# Altium PCB ESP32-Pico-Pill.PcbDoc
Units mil, origin at the board's own origin, x right, y up, seen from the top; angles counter-clockwise.
Board outline 1496.06 x 787.4 mil, 2 copper layers (Top Layer, Bottom Layer); 33 components, 54 nets, 231 pads, 65 vias.
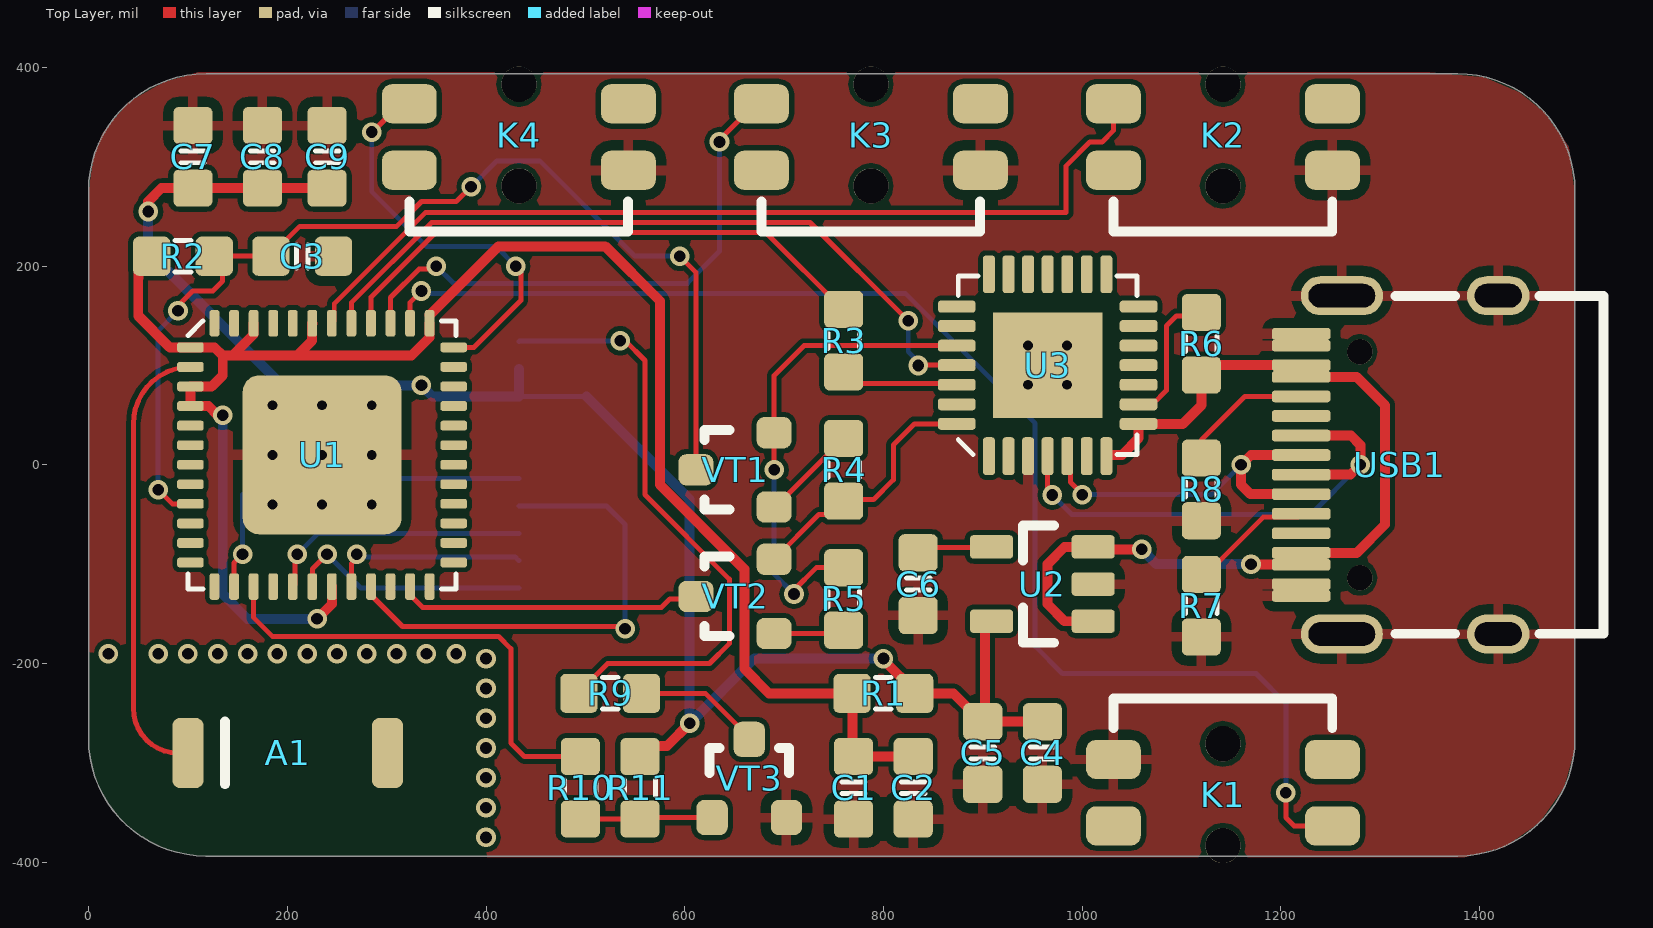
[diagram p0: Top Layer view]
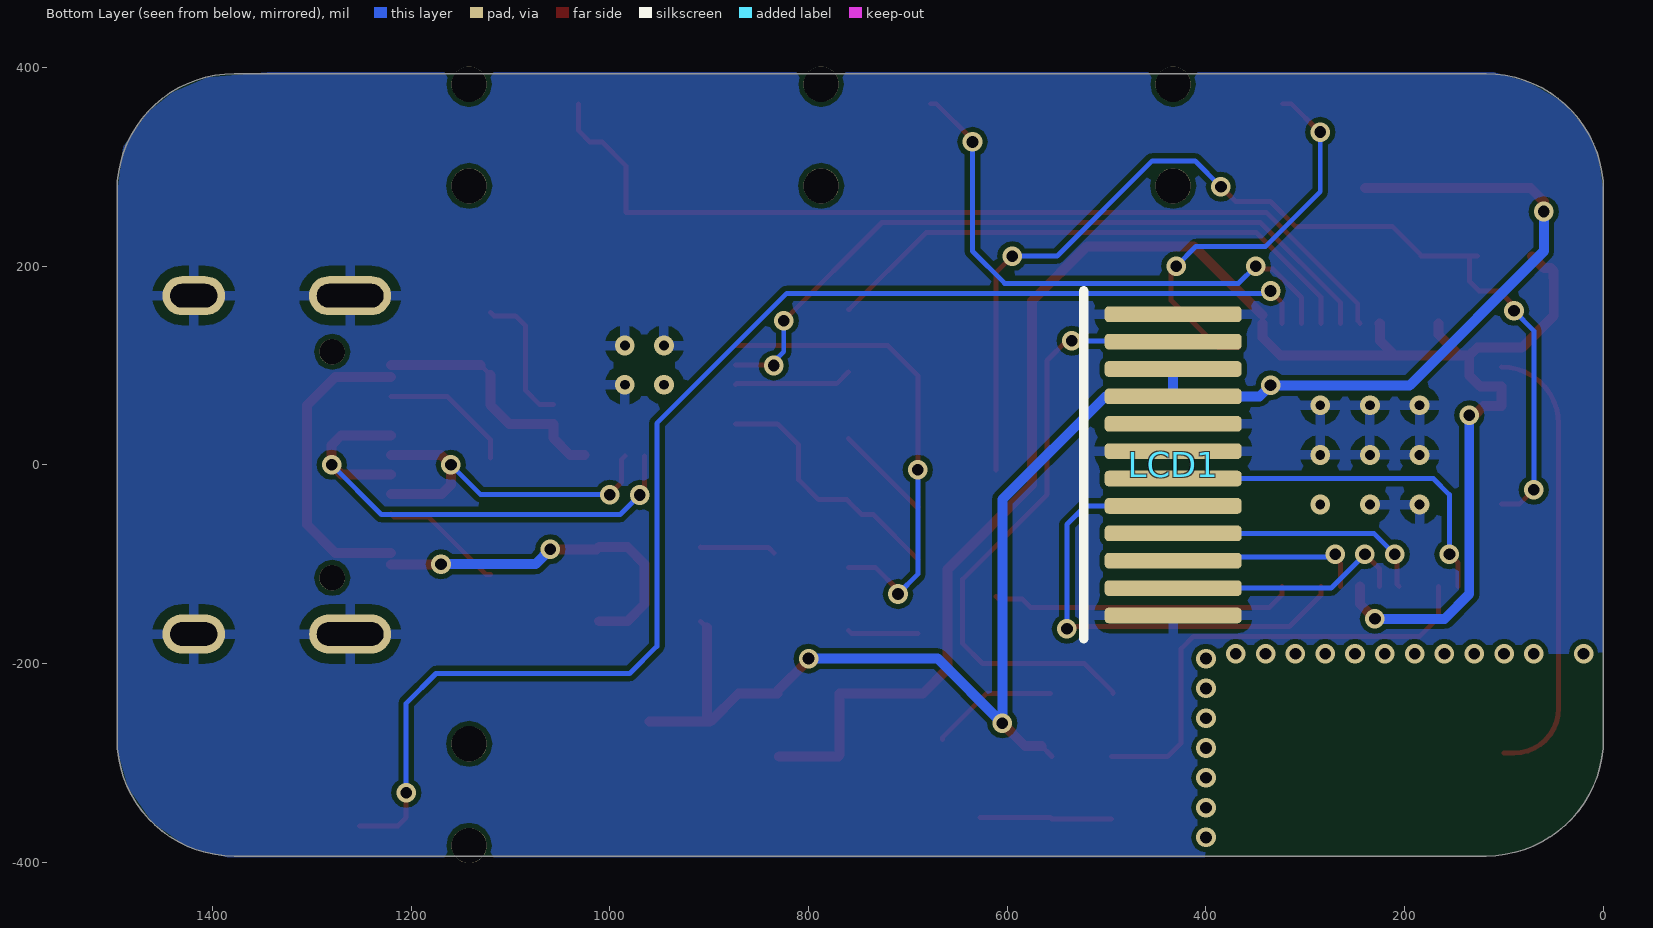
[diagram p1: Bottom Layer view, seen from below]

## Layer stack, top to bottom
Top Solder: solder mask 0.4, Solder Resist, Dk 3.5
Top Layer: signal copper 1.4
Dielectric 1: dielectric 12.6, FR-4, Dk 4.8
Bottom Layer: signal copper 1.4
Bottom Solder: solder mask 0.4, Solder Resist, Dk 3.5

## Board outline
118.11,-393.7 cw(c118.11,-275.59) 0,-275.59 0,275.59 cw(c118.11,275.59) 118.11,393.7 1377.95,393.7 cw(c1377.95,275.59) 1496.06,275.59 1496.06,-275.59 cw(c1377.95,-275.59) 1377.95,-393.7

## Design rules (kind name [scope] priority, off if disabled: settings)
Clearance [All] p1: gap=5 ignorepadtopadclearanceinfootprint=FALSE
DiffPairsRouting [All] p1: maxlimit=10 minlimit=3.5 mostfreqgap=3.5 toplayer_minwidth=15 toplayer_maxwidth=15 toplayer_prefwidth=15 bottomlayer_minwidth=15 bottomlayer_maxwidth=15 bottomlayer_prefwidth=15 maxuncoupledlength=500
HoleSize [All] p1: absolutevalues=TRUE maxlimit=248.03 minlimit=7.87 maxpercent=80.000 minpercent=20.000
PolygonConnect [All] p1: connectstyle=Relief reliefconductorwidth=10 reliefentries=4 polygonreliefangle="90 Angle" airgapwidth=10
RoutingTopology [All] p1: topology=Daisy_Simple
RoutingVias [All] p1: holewidth=11.81 width=19.68 viastyle="Through Hole" minholewidth=11.81 minwidth=19.68 maxholewidth=28 maxwidth=50
SolderMaskExpansion [All] p1: expansion=3
Width [All] p1: maxlimit=10 minlimit=5 preferedwidth=5
27 further rules are at their usual default settings.

## Components (designator, comment, footprint, x,y, rotation, side; value= is the part's Value field where it differs from the comment)
A1 "RAINSUN" ANT-Rainsun-AN5120 200.47,-290 r0 top
C1 "10uF" CAP_0603 770,-325 r90 top
C2 "0.1uF" CAP_0603 830,-325 r90 top
C3 "0.1uF" CAP_0603 215,210 r180 top
C4 "0.1uF" CAP_0603 960,-290 r270 top
C5 "10uF" CAP_0603 900,-290 r270 top
C6 "10nF" CAP_0603 835,-120 r270 top
C7 "0.1uF" CAP_0603 105,310 r90 top
C8 "0.1uF" CAP_0603 175,310 r90 top
C9 "0.1uF" CAP_0603 240,310 r90 top
K1 "Button" Button 1141.73,-330 r0 top locked
K2 "Button" Button 1141.73,330 r180 top locked
K3 "Button" Button 787.4,330 r180 top locked
K4 "Button" Button 433.07,330 r180 top locked
LCD1 "1.47LCD" IPS130-12 433.07,0 r270 bottom locked
R1 "0R" RES_0603 800,-230 r0 top
R2 "10K" RES_0603 95,210 r180 top
R3 "200R" RES_0603 760,125 r90 top
R4 "12K" RES_0603 760,-5 r270 top
R5 "12K" RES_0603 760,-135 r90 top
R6 "10K" RES_0603 1120,121.82 r90 top
R7 "5.1K" RES_0603 1120,-141.69 r270 top
R8 "5.1K" RES_0603 1120,-24.68 r90 top
R9 "10R" RES_0603 525,-230 r180 top
R10 "1K" RES_0603 495,-325 r270 top
R11 "10K" RES_0603 555,-325 r270 top
U1 "ESP32_SIP" ESP32-Pico 235,10 r0 top locked
U2 "LP2992_3.3v" LP2992 960,-120 r180 top
U3 "CP2102" CP2102 965.32,100.32 r90 top
USB1 "TYPE-C" TYPE-C 1220.47,0 r90 top locked
VT1 "S8050" s8050 690,-5 r270 top
VT2 "S8050" s8050 690,-132.4 r270 top
VT3 "S8050" s8050 665,-355 r180 top

## Footprints (in the part's own frame and the unit in brackets; to place one, negate y for a bottom-side part, rotate by r counter-clockwise, add the part's x,y. Pads: shape width x height; smd on the part's side, far side on the other; paste and mask are expansions set on the pad)
ANT-Rainsun-AN5120 [mm] "RAINSUN"
  rrect50% 0.8x1.8 smd: 0(2.552,0) 1(-2.552,0)
  silkscreen extent -1.6,-0.8 -1.6,0.8
Button [mm] "中乌龟4.8x3.6x4.6mm"
  round 0.9 hole 0.9 mask+0.076: 0(0,-1.35) 0(0,1.25)
  rrect50% 1.4x1 smd mask+0.076: 1(-2.8,-0.85) 2(2.8,-0.85) 3(-2.8,0.85) 4(2.8,0.85)
  silkscreen extent -2.79,1.65 2.79,2.41
CAP_0603 [mm] "0603 Capacitor"
  rrect30% 0.95x1 smd mask+0.076: 1(-0.8,0) 2(0.8,0)
  silkscreen extent -0.15,-0.3 0.15,0.3
CP2102 [mil] "QFN28"
  rect 106.3x110.24 smd mask+3: 0(0,0)
  rrect50% 38x12 smd mask+3: 1(-91.5,59.06) 1(-91.5,59.06) 1(-91.5,59.06) 1(-91.5,59.06) 1(91.5,-59.06) 2(-91.5,39.37) 2(-91.5,39.37) 3(-91.5,19.68) 3(-91.5,19.68) 4(-91.5,0) 4(-91.5,0) 5(-91.5,-19.69) 5(-91.5,-19.69) 6(-91.5,-39.37) 6(-91.5,-39.37) 7(-91.5,-59.06) 7(-91.5,-59.06) 15(91.5,-59.06) 16(91.5,-39.37) 17(91.5,-19.68) 18(91.5,0) 19(91.5,19.69) 20(91.5,39.37) 21(91.5,59.06)
  rrect50% 12x38 smd mask+3: 1(59.06,91.5) 8(-59.06,-91.5) 9(-39.37,-91.5) 10(-19.68,-91.5) 11(0,-91.5) 12(19.69,-91.5) 13(39.37,-91.5) 14(59.06,-91.5) 22(59.06,91.5) 23(39.37,91.5) 24(19.68,91.5) 25(0,91.5) 26(-19.69,91.5) 27(-39.37,91.5) 28(-59.06,91.5)
  silkscreen extent -90,-90 90,90
ESP32-Pico [mm] "QFN-48_7X7"
  rrect20% 4.06x4.06 smd mask+0.076: 0(0,0)
  rrect50% 0.68x0.25 smd mask+0.076: 1(-3.365,2.75) 1(-3.365,2.75) 1(-3.365,2.75) 1(-3.365,2.75) 2(-3.365,2.25) 2(-3.365,2.25) 3(-3.365,1.75) 3(-3.365,1.75) 4(-3.365,1.25) 4(-3.365,1.25) 5(-3.365,0.75) 5(-3.365,0.75) 6(-3.365,0.25) 6(-3.365,0.25) 7(-3.365,-0.25) 7(-3.365,-0.25) 8(-3.365,-0.75) 8(-3.365,-0.75) 9(-3.365,-1.25) 9(-3.365,-1.25) 10(-3.365,-1.75) 10(-3.365,-1.75) 11(-3.365,-2.25) 11(-3.365,-2.25) 12(-3.365,-2.75) 12(-3.365,-2.75) 25(3.365,-2.75) 26(3.365,-2.25) 27(3.365,-1.75) 28(3.365,-1.25) 29(3.365,-0.75) 30(3.365,-0.25) 31(3.365,0.25) 32(3.365,0.75) 33(3.365,1.25) 34(3.365,1.75) 35(3.365,2.25) 36(3.365,2.75)
  rrect50% 0.25x0.68 smd mask+0.076: 13(-2.75,-3.365) 13(-2.75,-3.365) 13(-2.75,-3.365) 13(-2.75,-3.365) 14(-2.25,-3.365) 14(-2.25,-3.365) 15(-1.75,-3.365) 15(-1.75,-3.365) 16(-1.25,-3.365) 16(-1.25,-3.365) 17(-0.75,-3.365) 17(-0.75,-3.365) 18(-0.25,-3.365) 18(-0.25,-3.365) 19(0.25,-3.365) 19(0.25,-3.365) 20(0.75,-3.365) 20(0.75,-3.365) 21(1.25,-3.365) 21(1.25,-3.365) 22(1.75,-3.365) 22(1.75,-3.365) 23(2.25,-3.365) 23(2.25,-3.365) 24(2.75,-3.365) 24(2.75,-3.365) 37(2.75,3.365) 38(2.25,3.365) 39(1.75,3.365) 40(1.25,3.365) 41(0.75,3.365) 42(0.25,3.365) 43(-0.25,3.365) 44(-0.75,3.365) 45(-1.25,3.365) 46(-1.75,3.365) 47(-2.25,3.365) 48(-2.75,3.365)
  silkscreen extent -3.43,-3.43 3.43,3.43
IPS130-12 [mm] "IPS LCD屏焊盘"
  rrect50% 0.4x3.5 smd mask+0.076: 1(-3.85,0) 2(-3.15,0) 3(-2.45,0) 4(-1.75,0) 5(-1.05,0) 6(-0.35,0) 7(0.35,0) 8(1.05,0) 9(1.75,0) 10(2.45,0) 11(3.15,0) 12(3.85,0)
  silkscreen extent -4.45,-2.29 4.44,-2.29
LP2992 [mm] "LP2992_3.3v"
  rrect30% 1.1x0.6 smd mask+0.07: 1(-1.3,0.95) 2(-1.3,0) 3(-1.3,-0.95) 4(1.3,-0.95) 5(1.3,0.95)
  silkscreen extent -0.3,-1.5 0.5,1.5
RES_0603 [mm] "0603 Resistor"
  rrect30% 0.95x1 smd mask+0.076: 1(-0.8,0) 2(0.8,0)
  silkscreen extent -0.2,-0.4 0.2,0.4
s8050 [mm] "SOT23"
  rrect50% 0.8x0.9 smd: 1(0,-2) 2(-0.95,0) 3(0.95,0)
  silkscreen extent -1.02,-1.78 1.02,-1.14
TYPE-C [mm] "TYPE-C 16P"
  round 0.65 hole 0.65 mask+0.076: 0(-2.89,-1.5) 0(2.89,-1.5)
  oval 1x1.6 hole 1.2 slot 0.6 at 0 deg mask+0.076: 1(4.325,-5.04) 2(-4.325,-5.04)
  oval 1x2.1 hole 1.7 slot 0.6 at 0 deg mask+0.076: 3(-4.325,-1.04) 4(4.325,-1.04)
  rrect50% 0.3x1.5 smd mask+0.076: A1(-3.35,0) A4(-2.55,0) A5(-1.25,0) A6(-0.25,0) A7(0.25,0) A8(1.25,0) A9(2.55,0) A12(3.35,0) B1(3.05,0) B4(2.25,0) B5(1.75,0) B6(0.75,0) B7(-0.75,0) B8(-1.75,0) B9(-2.25,0) B12(-3.05,0)
  silkscreen extent -4.32,-7.73 4.32,-2.41

## Part data
A1: library part ANT-Rainsun-AP5120
C1 C5: library part CAP_0603_10uF
C2 C3 C4 C7 C8 C9: library part CAP_0603_0.1uF
C6: library part CAP_0603_10nF
K1 K2 K3 K4: "中乌龟4.8x3.6x4.6mm"
R1: library part RES_0603_0R
R2 R6 R11: library part RES_0603_10K
R3: library part RES_0603_200R
R4 R5: library part RES_0603_12K
R7 R8: library part RES_0603_5.1K
R9: library part RES_0603_10R
R10: library part RES_0603_1K
U1: library part ESP32-Pico-D4
USB1: "TYPE-C  16P"
VT1 VT2 VT3: "SOT23"

## Via types
v1: diameter 19.68, hole 11.81, Top Layer to Bottom Layer, 51 vias
v2: diameter 20, hole 10, Top Layer to Bottom Layer, tented both sides, 14 vias

## Nets (pads, with @x,y where several pads share a name; then routed paths per layer and width w, separated by ;. In a path a pad name is that pad's centre, name@x,y a point inside that pad or via, vN(x,y) a via of type N, cw(c..) or ccw(c..) an arc to the next point about the centre after c; other vN are vias at no path point)
3V3A: C1.2 C2.2 R1.1 R2.2 U1.1 U1.3 U1.4 U1.19 U1.37 U1.43 U1.46 | length 1861.7
  Top Layer w5: v1@130,50 v1(135,50) ; v1@230,-160 v1(230,-155) ; U1.19@244.84,-122.48 U1.19@247.26,-124.9 ; R1.1 R1.1@768.76,-230.26 ; C1.2@768.76,-292.26 C1.2
  Top Layer w10: R2.2@72.01,210 60,197.99 52.81,197.99 50.18,195.36 50.18,188.17 50,187.99 50,150 81.73,118.27 102.52,118.27 126.73,118.27 135,110 ; v1@130,50 120.79,59.21 102.52,59.21 102.52,78.9 123.9,78.9 135,90 135,110 ; U1.46 166.1,131.16 144.94,110 ; U1.43 225.08,142.4 225.08,125.08 210,110 ; v1(230,-155) 244.84,-140.16 U1.19@244.84,-122.48 ; U1.37 343.27,128.27 325,110 210,110 ; U1.37@343.35,150.87 412.48,220 520,220 575,165 575,-20 660,-105 660,-205 685,-230 R1.1 ; C1.2@768.76,-292.26 R1.1@768.76,-230.26 ; C1.2 C2.2 ; 135,110 144.94,110 ; 144.94,110 210,110
  Bottom Layer w10: v1(135,50) 135,-130 160,-155 v1(230,-155)
CP_Rx: U1.41 U3.25 | length 743.7
  Top Layer w5: U1.41 264.53,163.2 345.23,243.9 726.1,243.9 v1(825,145) ; v1(835,100) 835.32,100.32 U3.25
  Bottom Layer w5: v1(825,145) 825,113.97 835,103.97 v1(835,100)
CP_Tx: R3.2 U1.40 | length 561.1
  Top Layer w5: U1.40 284.21,168.74 349.37,233.9 681.61,233.9 759.02,156.5 R3.2
DTR: R4.2 U3.28 VT2.2 | length 260.8
  Top Layer w5: VT2.2 735,-50 746.5,-50 R4.2 761.5,-35 790,-35 810,-15 810,20 831.26,41.26 U3.28
EN: C3.2 R2.1 U1.9 VT1.1 | length 1082.4
  Top Layer w5: v1(70,-25) 84.21,-39.21 U1.9@102.52,-39.21 ; v1(90,155) 90,160 105,175 125,175 135,185 R2.1@135,210 ; R2.1 R2.1@135,210 ; v1(385,280) 370,265 335,265 310,240 212.52,240 183.5,210.98 C3.2 R2.1@135,210 ; v1(595,210) 611.26,193.74 VT1.1
  Bottom Layer w5: v1(70,-25) 70,135 v1(90,155) ; v1(385,280) 411,306 454,306 550,210 v1(595,210)
FLASH_CLK: U1.31
FLASH_CS: U1.25
FLASH_SD0: U1.27
FLASH_SD1: U1.33
FLASH_SD2: U1.30
FLASH_SD3: U1.32
GND: C1.1 C2.1 C3.1 C4.2 C5.2 C6.2 C7.2 C8.2 C9.2 K1.3 K2.3 K3.3 K4.3 LCD1.1 LCD1.5 LCD1.6 LCD1.12 R7.2 R8.1 U1.0 U2.2 U3.0 U3.3 USB1.1 USB1.2 USB1.3 USB1.4 USB1.A1 USB1.A12 USB1.B1 USB1.B12 VT3.2
  other v2: 185,-40 235,-40 285,-40 185,10 235,10 285,10 185,60 235,60 285,60 945.63,80.63 945.63,80.63 985,80.63 945.63,120 985,120
GPIO0: U1.23 VT2.1 | length 305.8
  Top Layer w5: U1.23@323.58,-122.48 323.58,-130.94 336,-143.37 576.63,-143.37 585,-135 608.66,-135 VT2.1
GPIO2: U1.22
GPIO4: U1.24
GPIO5: U1.34
GPIO9: U1.28
GPIO10: U1.29
GPIO12: LCD1.11 U1.18 | length 245.8
  Top Layer w5: U1.18@225.16,-122.48 225.16,-104.84 v1(240,-90)
  Bottom Layer w5: v1(240,-90) 274.02,-124.02 LCD1.11
GPIO13: LCD1.10 U1.20 | length 200.5
  Top Layer w5: U1.20@264.53,-122.48 264.53,-99.45 270,-93.97 v1(270,-90)
  Bottom Layer w5: v1(270,-90) 272.81,-92.81 429.42,-92.81 LCD1.10
GPIO14: LCD1.9 U1.17 | length 266.2
  Top Layer w5: U1.17@205.47,-122.48 207.74,-120.22 207.74,-92.26 v1(210,-90)
  Bottom Layer w5: v1(210,-90) 231.1,-68.9 LCD1.9
GPIO15: LCD1.8 U1.21 | length 498
  Top Layer w5: U1.21@284.21,-122.48 284.21,-130.94 315.93,-162.66 537.66,-162.66 v1(540,-165)
  Bottom Layer w5: LCD1.8 521.34,-41.34 540,-60 v1(540,-165)
GPIO18: U1.35
GPIO19: K1.2 U1.38 | length 1376.1
  Top Layer w5: U1.38 323.58,163.58 v1(335,175) ; v1(1205,-330) 1205,-355 1213.46,-363.46 K1.2
  Bottom Layer w5: v1(335,175) 337.34,172.66 821.87,172.66 952.66,41.87 952.66,-182.66 980,-210 1175,-210 1205,-240 v1(1205,-330)
GPIO21: K2.2 U1.42 | length 931.9
  Top Layer w5: U1.42 247.26,144.9 247.26,162.26 338.9,253.9 983.9,253.9 983.9,301.02 1007.8,324.92 1020.14,324.92 1031.5,336.28 K2.2
GPIO22: K3.2 U1.39 | length 560
  Top Layer w5: U1.39 303.9,168.42 332.66,197.19 347.19,197.19 v1(350,200) ; v1(635,325) 635,327.09 671.38,363.46 K3.2
  Bottom Layer w5: v1(350,200) 367.34,182.66 602.66,182.66 635,215 v1(635,325)
GPIO23: K4.2 U1.36 | length 409.4
  Top Layer w5: v1(285,335) 285.75,335 314.21,363.46 K4.2 ; U1.36 387.88,118.27 435,165.39 435,195 v1(430,200)
  Bottom Layer w5: v1(285,335) 285,275 340,220 410,220 v1(430,200)
GPIO25: LCD1.7 U1.14 | length 380.8
  Top Layer w5: U1.14@146.42,-122.48 146.42,-98.58 v1(155,-90)
  Bottom Layer w5: v1(155,-90) 155,-30 171.22,-13.78 LCD1.7
GPIO26: R10.1 U1.15 | length 473.7
  Top Layer w5: U1.15@166.1,-122.48 166.1,-153.76 185,-172.66 412.66,-172.66 425,-185 425,-280 438.5,-293.5 R10.1
GPIO27: U1.16
GPIO32: U1.12
GPIO33: U1.13
GPIO34: U1.10
GPIO35: U1.11
GPIO37: U1.6
GPIO38: U1.7
LEDK: LCD1.2 R9.2 | length 628.6
  Top Layer w5: R9.2 493.5,-229.02 522.52,-200 625,-200 645,-180 645,-115 560,-30 560,105 540,125 v1(535,125)
  Bottom Layer w5: LCD1.2 433.56,124.51 534.51,124.51 v1(535,125)
NetA1_1: A1.1 U1.2 | length 457.1
  Top Layer w5: A1.1 90,-290 cw(c90,-245) 45,-245 45,41.06 cw(c102.52,41.06) U1.2@102.52,98.58
NetC6_1: C6.1 U2.4 | length 76.3
  Top Layer w5: C6.1 840.36,-83.14 908.28,-83.14 U2.4
NetR3_1: R3.1 U3.26 | length 119.1
  Top Layer w5: R3.1 771.73,81.77 872.67,81.77 U3.26
NetR4_1: R4.1 VT1.3 | length 98.5
  Top Layer w5: VT1.3 691.04,-42.4 759.94,26.5 R4.1
NetR5_1: R5.1 VT2.3 | length 71.4
  Top Layer w5: VT2.3 756.69,-169.8 R5.1
NetR6_2: R6.2 U3.9 | length 139.5
  Top Layer w5: U3.9 1070.98,60.94 1085,74.97 1085,140 1095,150 1116.69,150 R6.2
NetR7_1: R7.1 USB1.A5 | length 125.7
  Top Layer w5: R7.1 1124.81,-110.19 1182.66,-52.34 1217.35,-52.34 USB1.A5
NetR8_2: R8.2 USB1.B5 | length 136.8
  Top Layer w5: R8.2 1120,25 1163.9,68.9 USB1.B5
NetR9_1: R9.1 VT3.1 | length 128.8
  Top Layer w5: R9.1 620.71,-230 665,-274.29 VT3.1
NetR10_2: R10.2 R11.2 VT3.3 | length 133.2
  Top Layer w5: R10.2 R11.2 556.5,-355 VT3.3
RTS: R5.2 U3.24 VT1.2 | length 487.8
  Top Layer w5: v1(690,-5) VT1.2 690,90 720,120 U3.24 ; v1(710,-130) 710,-126.03 732.52,-103.5 R5.2
  Bottom Layer w5: v1(690,-5) 690,-110 v1(710,-130)
SENSOR_VN: U1.8
SENSOR_VP: U1.5
USB-PWR-DM: U3.5 USB1.A7 USB1.B7 | length 366.4
  Top Layer w5: U3.5@985,8.82 988.19,5.62 988.19,-17.28 1000,-29.09 v1(1000,-30)
  Top Layer w10: USB1.B7 1169.53,-29.53 1160,-20 v1(1160,0) 1169.84,9.84 USB1.A7
  Bottom Layer w5: v1(1000,-30) 1130,-30 v1(1160,0)
USB-PWR-DP: U3.4 USB1.A6 USB1.B6 | length 527
  Top Layer w5: U3.4@965.32,8.82 965.32,-25.32 970,-30 v1(970,-30.31)
  Top Layer w10: USB1.A6 1270.16,-9.84 v1(1280,0) 1280,20 1270.47,29.53 USB1.B6
  Bottom Layer w5: v1(970,-30.31) 989.69,-50 1230,-50 v1(1280,0)
VBUS: R6.1 U2.1 U2.3 U3.7 U3.8 USB1.A4 USB1.A9 USB1.B4 USB1.B9 | length 936.4
  Top Layer w5: U2.3 U2.3@1013.58,-85 ; U3.7@1024.37,8.82 U3.7@1025.56,10 ; R6.1 R6.1@1130.07,100.39 ; v1(1170,-100) v1@1170.39,-100.39
  Top Layer w10: U2.1 982.4,-157.4 965,-140 965,-100 982.4,-82.6 U2.3 ; U2.3@1013.58,-85 v1(1060,-85) ; U3.7@1025.56,10 1040,10 1056.82,26.82 U3.8 1101.26,41.26 1120,60 R6.1 ; R6.1@1130.07,100.39 USB1.A9 ; v1@1170.39,-100.39 USB1.A4 ; USB1.B9 1276.42,-88.58 1305,-60 1305,60 1276.42,88.58 USB1.B4
  Bottom Layer w10: v1(1060,-85) 1075,-100 v1(1170,-100)
VCC_3V3: C4.1 C5.1 C7.1 C8.1 C9.1 LCD1.3 LCD1.4 R1.2 R11.1 U2.5 | length 1715.9
  Top Layer w5: C8.1 176.5,278.5 C8.1@176.5,278.25 ; R11.1 R11.1@565.69,-282.81 ; v1@800,-196.26 v1(800,-195) ; R1.2 R1.2@831.5,-227.76 ; C5.1@899.02,-258.5 C5.1 C5.1@902.39,-256.11 ; U2.5@902.39,-163.83 U2.5
  Top Layer w10: v1(60,255) 60,265 73.5,278.5 C7.1 C8.1 ; C8.1@176.5,278.5 C9.1 ; R11.1@565.69,-282.81 582.19,-282.81 v1(605,-260) ; v1@800,-196.26 R1.2@831.5,-227.76 ; R1.2 870.51,-230 C5.1@899.02,-258.5 ; C5.1 C4.1 ; C5.1@902.39,-256.11 U2.5@902.39,-163.83
  Bottom Layer w5: LCD1.4 LCD1.4@501.1,68.9
  Bottom Layer w10: v1(60,255) 60,215 195,80 v1(335,80) 346.1,68.9 LCD1.4 LCD1.3 ; LCD1.4@501.1,68.9 605,-35 v1(605,-260) 670,-195 v1(800,-195)
pads on no net: A1.0 K1.0 K1.1 K1.4 K2.0 K2.1 K2.4 K3.0 K3.1 K3.4 K4.0 K4.1 K4.4 U1.26 U1.44 U1.45 U1.47 U1.48 U3.1 U3.2 U3.6 U3.10 U3.11 U3.12 U3.13 U3.14 U3.15 U3.16 U3.17 U3.18 U3.19 U3.20 U3.21 U3.22 U3.23 U3.27 USB1.0 USB1.A8 USB1.B8
copper on no net:
  other v1: 400,-375 400,-345 400,-315 400,-285 400,-255 400,-225 400,-195 20,-190 70,-190 100,-190 130,-190 160,-190 190,-190 220,-190 250,-190 280,-190 310,-190 340,-190 370,-190

## Polygon pours and split planes (outlines as drawn)
GND on Bottom Layer "GND_L02_P040" (solid, pour order 40): 110,395 75,385 40,365 15,335 5,310 0,275 0,-190 370,-190 400,-195 400,-395 1385,-395 1425,-385 1460,-360 1485,-325 1495,-290 1495,280 1490,320 1465,355 1440,375 1405,390 1345,395
GND on Top Layer "GND_L01_P042" (solid, pour order 42): 110,395 75,385 40,365 15,335 5,310 0,275 0,-190 370,-190 400,-195 400,-395 1385,-395 1425,-385 1460,-360 1485,-325 1495,-290 1495,280 1490,320 1465,355 1440,375 1405,390 1350,395

## Silkscreen, mask and mechanical layers (free items; w line width, h text height)
Mechanical 1:
  the board outline again, w10